# Altium PCB Moto Power Supply 4x12v 4x5v.PcbDoc
Units mil, origin at the board's own origin, x right, y up, seen from the top; angles counter-clockwise.
Board outline 6000 x 4000 mil, 2 copper layers (Top Layer, Bottom Layer); 26 components, 18 nets, 58 pads, 0 vias.
Unrouted connection lines stored in the file: 34.
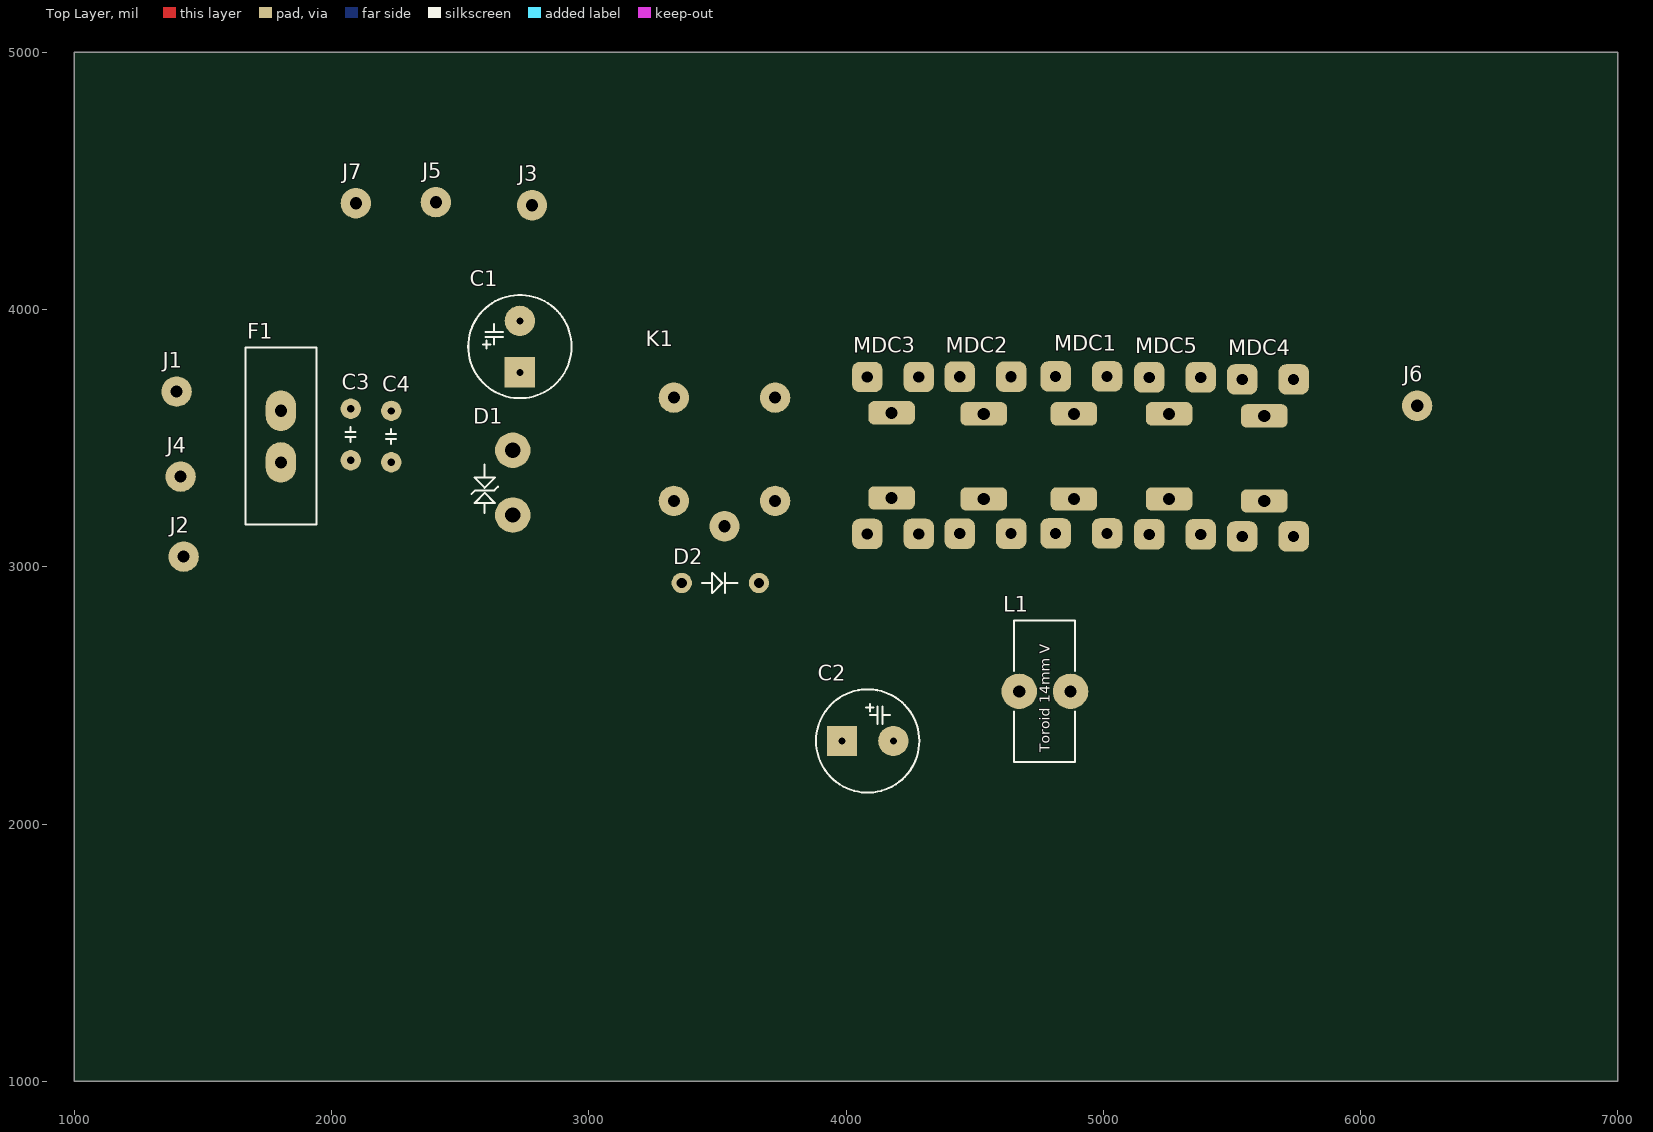
[diagram p0: Top Layer view]
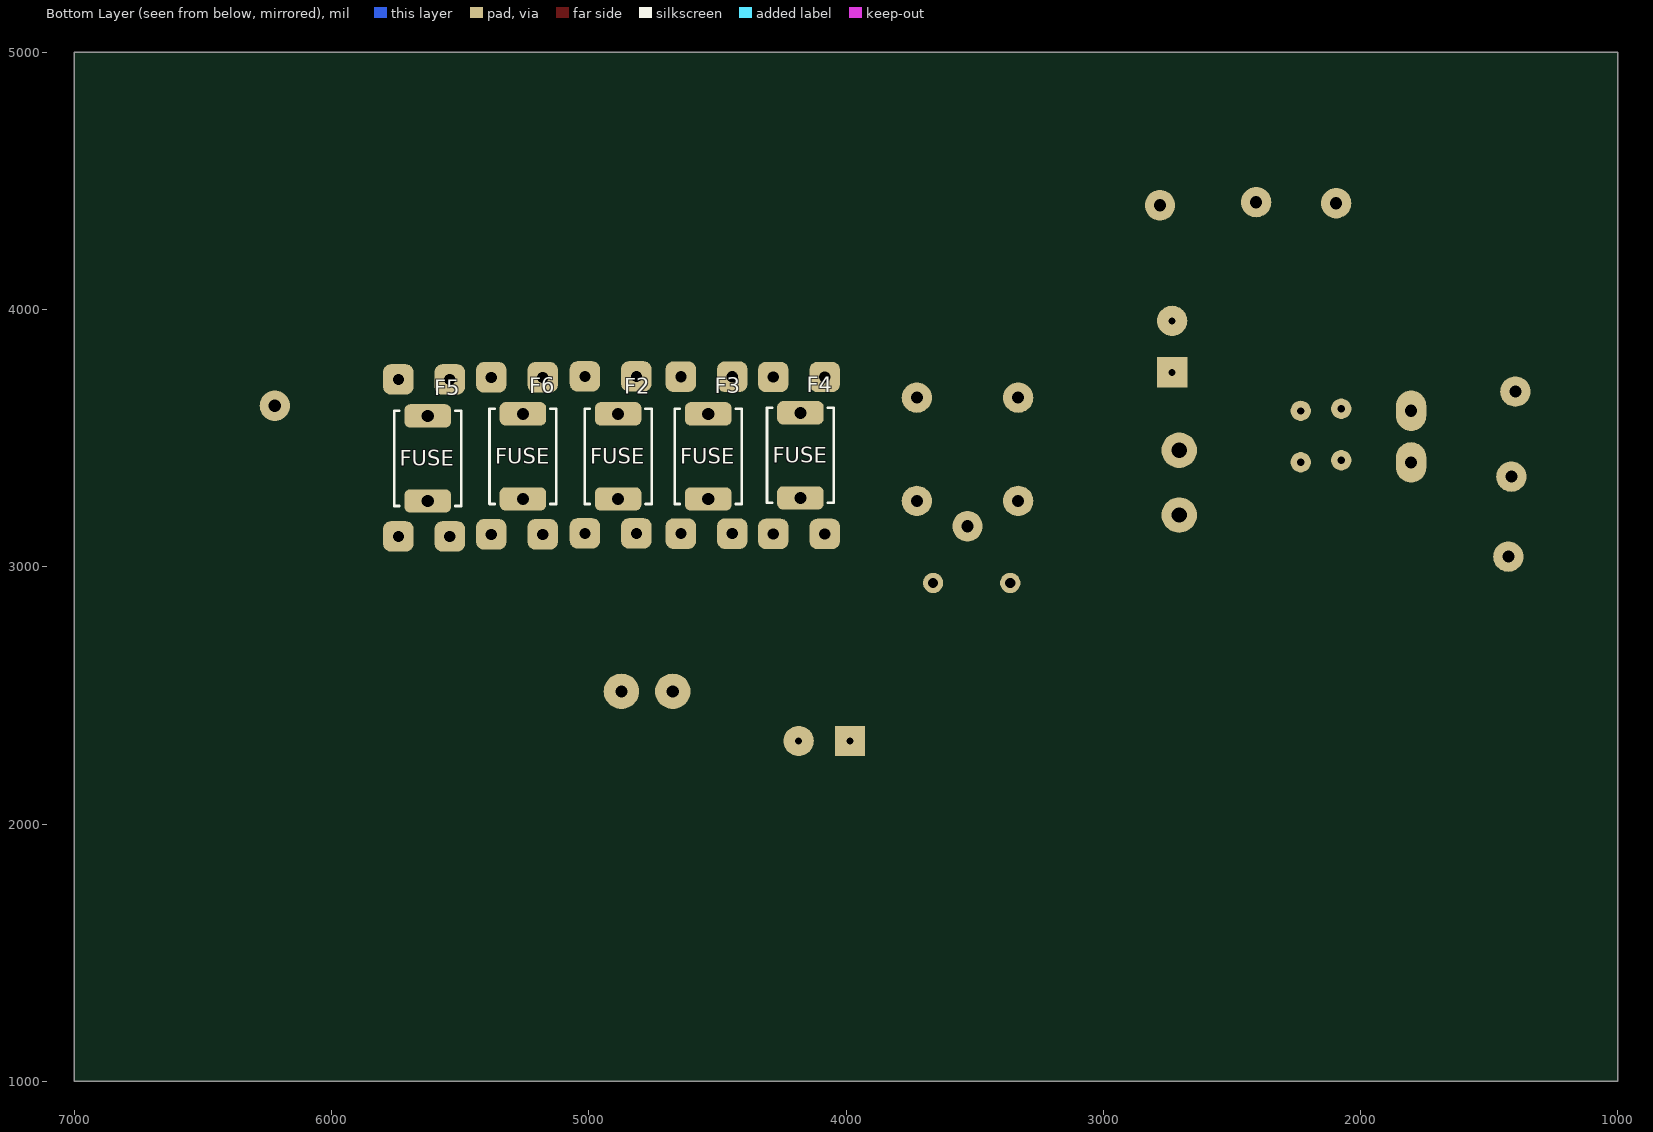
[diagram p1: Bottom Layer view, seen from below]

## Layer stack, top to bottom
Top Solder: solder mask 0.4, Solder Resist, Dk 3.5
Top Layer: signal copper 1.4
Dielectric 1: dielectric 12.6, FR-4, Dk 4.8
Bottom Layer: signal copper 1.4
Bottom Solder: solder mask 0.4, Solder Resist, Dk 3.5

## Board outline
1000,1000 7000,1000 7000,5000 1000,5000

## Design rules (kind name [scope] priority, off if disabled: settings)
Clearance [All] p1: gap=10 ignorepadtopadclearanceinfootprint=FALSE except(0: Arc-Hole Track-Hole SMDPad-Hole THPad-Hole Via-Hole Fill-Hole Poly-Hole Region-Hole Text-Hole)
PolygonConnect [All] p1: connectstyle=Relief reliefconductorwidth=10 reliefentries=4 polygonreliefangle="90 Angle" airgapwidth=10
RoutingVias [All] p1: holewidth=28 width=50 viastyle="Through Hole" minholewidth=28 minwidth=50 maxholewidth=28 maxwidth=50
SolderMaskExpansion [All] p1: expansion=4 istentingtop=FALSE
Width [All] p1: maxlimit=10 minlimit=10 preferedwidth=10
30 further rules are at their usual default settings.

## Components (designator, comment, footprint, x,y, rotation, side; value= is the part's Value field where it differs from the comment)
C1 "25V 1000uF" "Cap E p5.08mm D10.2mm (3p)" 2732.28,3755.91 r90 top
C2 "25V 1000uF" "Cap E p5.08mm D10.2mm (3p)" 3984.25,2322.83 r0 top
C3 "10n" "Cap P5.08MM (3p) disk2" 2074.8,3414.17 r90 top
C4 "100n" "Cap P5.08MM (3p) disk2" 2232.28,3406.3 r90 top
D1 "1.5KE20CA" "TVS diode DO-201 V" 2704.72,3200.79 r90 top
D2 "1N5819" "Diode DO-35" 3361.42,2937.01 r0 top
F1 "A" "Fuse RGE1100" 1803.15,3606.3 r0 top
F2 "2.5A" "Fuse SM250" 4885.83,3594.49 r270 bottom
F3 "2.5A" "Fuse SM250" 4535.43,3594.49 r270 bottom
F4 "2.5A" "Fuse SM250" 4177.17,3598.43 r270 bottom
F5 "2.5A" "Fuse SM250" 5625.98,3586.61 r270 bottom
F6 "2.5A" "Fuse SM250" 5255.91,3594.49 r270 bottom
J1 "OnePinC" "OnePin 1.2x3" 1397.64,3681.1 r0 top
J2 "OnePinC" "OnePin 1.2x3" 1425.2,3039.37 r0 top
J3 "OnePinC" "OnePin 1.2x3" 2779.53,4405.51 r0 top
J4 "OnePinC" "OnePin 1.2x3" 1413.39,3350.39 r0 top
J5 "OnePinC" "OnePin 1.2x3" 2405.51,4417.32 r0 top
J6 "OnePinC" "OnePin 1.2x3" 6220.47,3625.98 r0 top
J7 "OnePinC" "OnePin 1.2x3" 2094.49,4413.39 r0 top
K1 "SRA-12VDC-CL" SRA-12VDC-CL 3527.56,3157.48 r90 top
L1 "Inductor V" "Toroid V D14-W6" 4673.23,2515.75 r0 top value=700uH
MDC1 "DC-DC" "DC-DC_MP1584N (SMALL R)" 4815,3129.76 r90 top
MDC2 "DC-DC" "DC-DC_MP1584N (SMALL R)" 4442.05,3128.7 r90 top
MDC3 "DC-DC" "DC-DC_MP1584N (SMALL R)" 4082.6,3127.64 r90 top
MDC4 "DC-DC" "DC-DC_MP1584N (SMALL R)" 5540.16,3118.11 r90 top
MDC5 "DC-DC" "DC-DC_MP1584N (SMALL R)" 5178.9,3126.06 r90 top

## Footprints (in the part's own frame and the unit in brackets; to place one, negate y for a bottom-side part, rotate by r counter-clockwise, add the part's x,y. Pads: shape width x height; smd on the part's side, far side on the other; paste and mask are expansions set on the pad)
"Cap E p5.08mm D10.2mm (3p)" [mm] "D 10.2mm; H 17.5mm, Hole: 0.7mm"
  rect 3x3 hole 0.7: 1(0,0)
  round 3 hole 0.7: 2(5.08,0)
  silkscreen extent -2.56,-5.1 7.64,5.1, body extent -2.49,-4.97 7.57,5.08, height 16.53
"Cap P5.08MM (3p) disk2" [mm]
  round 2 hole 0.7: 1(0,0) 2(5.08,0)
  silkscreen extent 1.8,-0.48 3.3,0.53, body extent -0.29,-1.12 5.29,1.16, height 6.04
"DC-DC_MP1584N (SMALL R)" [mm]
  rrect50% 3x3 hole 1.1: GND(0,-5.08) GND(15.5,-5.08) IN(0,0) Out(15.5,0)
  body extent -1.27,-6.35 16.84,1.25, height 11.8
"Diode DO-35" [mm] "p7.62mm"
  round 2 hole 1: A(0,0) K(7.62,0)
  silkscreen extent 2,-1 5.5,1, body extent -0.32,-1 7.82,1.02, height 2.21
"Fuse RGE1100" [mm] "Resettable 11A"
  oval 3x4 hole 1.2: 1(0,0) 2(0,-5.1)
  silkscreen extent -3.5,-11.25 3.5,6.25, body extent -1.53,-6.19 1.43,1.39, height 15
"Fuse SM250" [mm] "Resettable 11A"
  rrect50% 2.3x4.6 hole 1.2: 1(0,0) 2(8.4,0)
  silkscreen extent -0.5,-3.3 8.9,3.3, body extent -0.5,-3.35 8.9,3.36, height 3
"OnePin 1.2x3" [mm]
  round 3 hole 1.2: 1(0,0)
SRA-12VDC-CL [mm]
  round 3 hole 1.2: 1(12.7,5) 2(0,0) 3(12.7,-5) 4(2.5,-5) 5(2.5,5)
  body extent -3,-8 17,8, height 15
"Toroid V D14-W6" [mm] "10mm Black ring TEC.ORG"
  round 3.5 hole 1.2: 1(0,0) 2(5.08,0)
  silkscreen extent -0.5,-7 5.5,7
"TVS diode DO-201 V" [mm] "6p, p15.24mm"
  round 3.5 hole 1.5: 1(0,0) 2(6.4,0)
  silkscreen extent 0.2,1.47 5,4.07, body extent -2.8,-2.8 7.09,2.8, height 15.69

## Part data
C1 C2: library part "Cap E 1000mF x 25V", "Capacitor"
C3 C4: library part "Cap Ceramic", "Capacitor"
D1: library part "TVS 1.5KE20CA", "1500W Transil (TVS Diode)", Pulse Power=1500W, Breakdown V="min 19 max 21", Load A=5, PackageReference=DO-201, Stand-Off V=17.1
D2: library part "Diode 1N5819", "1 Amp General Purpose Rectifier", PackageReference=DO-41
F1 F2 F3 F4 F5 F6: library part Fuse, "Round fuse"
J1 J2 J3 J4 J5 J6 J7: library part "OnePin Connector", "Only pad"
K1: "Single-Pole Dual-Throw Relay", DataSheet=http://tec.org.ru/_bd/12/1208_SRA.pdf, I (AC = 240 V)=15-20A, I (DC = 30 V)=10A, Name=SRA-12VDC-CL, R обм="240 Om", U="12 V"
L1: "Inductor Vertical", Code_IEC=1005, Code_JEITA=0402, LatestRevisionDate=29-May-2009, LatestRevisionNote="IPC-7351 Footprint Added.", PackageDescription="Chip Inductor", PackageReference=0402-A, Published=8-Jun-2000, Publisher="Altium Limited"
MDC1 MDC2 MDC3 MDC4 MDC5: library part "DC-DC MP1584N", "DC-DC StepDown"

## Nets (pads, with @x,y where several pads share a name; then routed paths per layer and width w, separated by ;. In a path a pad name is that pad's centre, name@x,y a point inside that pad or via, vN(x,y) a via of type N, cw(c..) or ccw(c..) an arc to the next point about the centre after c; other vN are vias at no path point)
+5V: J7.1
"+5V #1": MDC1.Out
"+5V #2": MDC2.Out
"+5V #3": MDC3.Out
"+5V #4": MDC4.Out
"+5V #5": MDC5.Out
"+12 V RAW": C1.1 C3.1 C4.1 D1.2 L1.1
+12V: F1.1 J1.1
"+12V Engine": J5.1
"+12V No Noise": C2.1 F2.1 F3.1 F4.1 F5.1 F6.1 J6.1 L1.2
GND: C2.2 C4.2 D1.1 D2.A J2.1 K1.5 MDC1.GND MDC2.GND MDC3.GND MDC4.GND MDC5.GND
NetF2_2: F2.2 MDC1.IN
NetF3_2: F3.2 MDC2.IN
NetF4_2: F4.2 MDC3.IN
NetF5_2: F5.2 MDC4.IN
NetF6_2: F6.2 MDC5.IN
"ON Engine": J3.1
"ON Ingition": D2.K J4.1 K1.4
pads on no net: C1.2 C3.2 F1.2 K1.1 K1.2 K1.3

## Text inside footprints (layer, text, board x,y; h text height)
F2: Bottom Overlay "FUSE" at 4993.94,3399.76 h60
F3: Bottom Overlay "FUSE" at 4643.54,3399.76 h60
F4: Bottom Overlay "FUSE" at 4285.28,3403.7 h60
F5: Bottom Overlay "FUSE" at 5734.09,3391.89 h60
F6: Bottom Overlay "FUSE" at 5364.02,3399.76 h60
L1: Top Overlay "Toroid 14mm V" at 4791.34,2279.53 h39.37 r90